# Altium PCB SM-sketch.PcbDoc
Units mm, origin at the board's own origin, x right, y up, seen from the top; angles counter-clockwise.
Board outline 433.1 x 352.2 mm, 2 copper layers (Top Layer, Bottom Layer); 15 components, 0 nets, 2 pads, 0 vias.
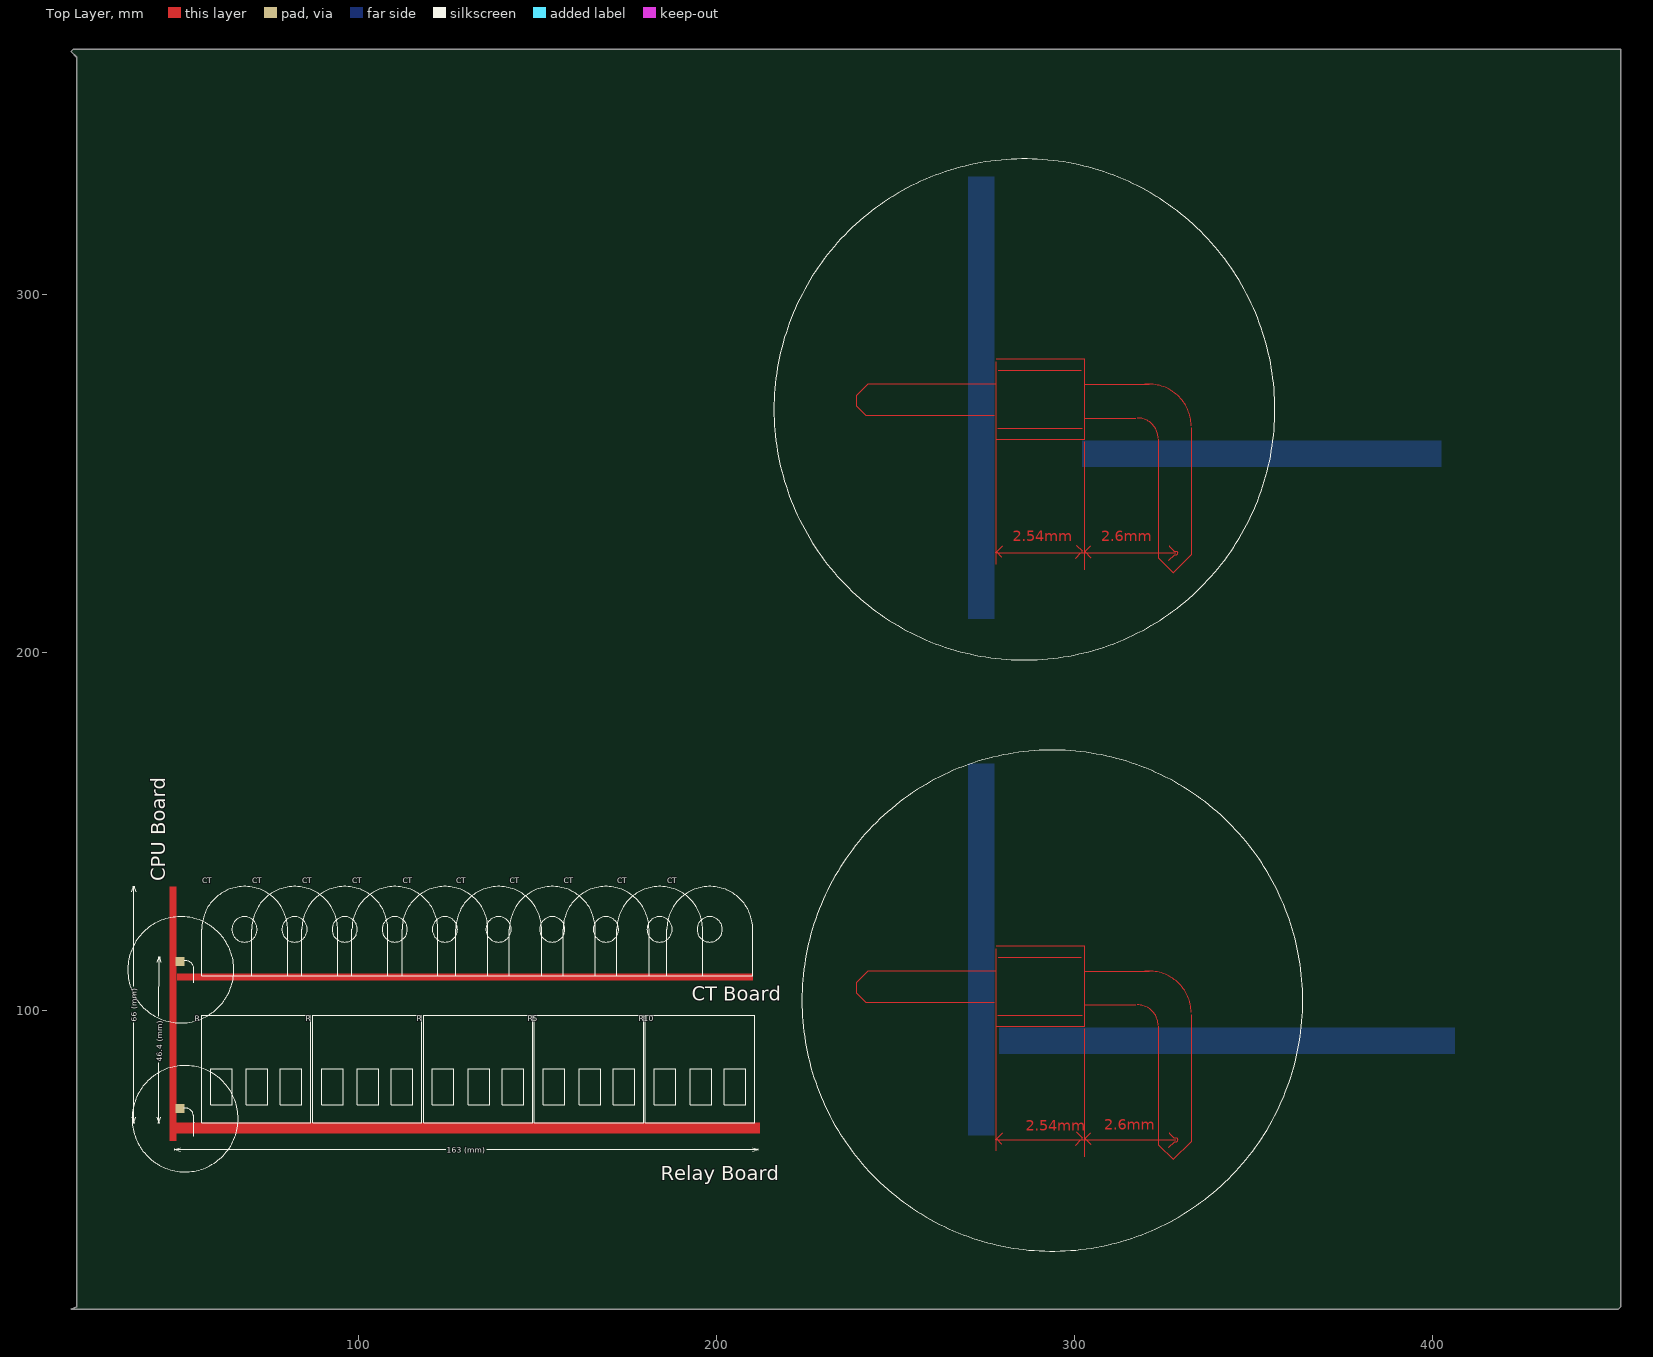
[diagram p0: Top Layer view]
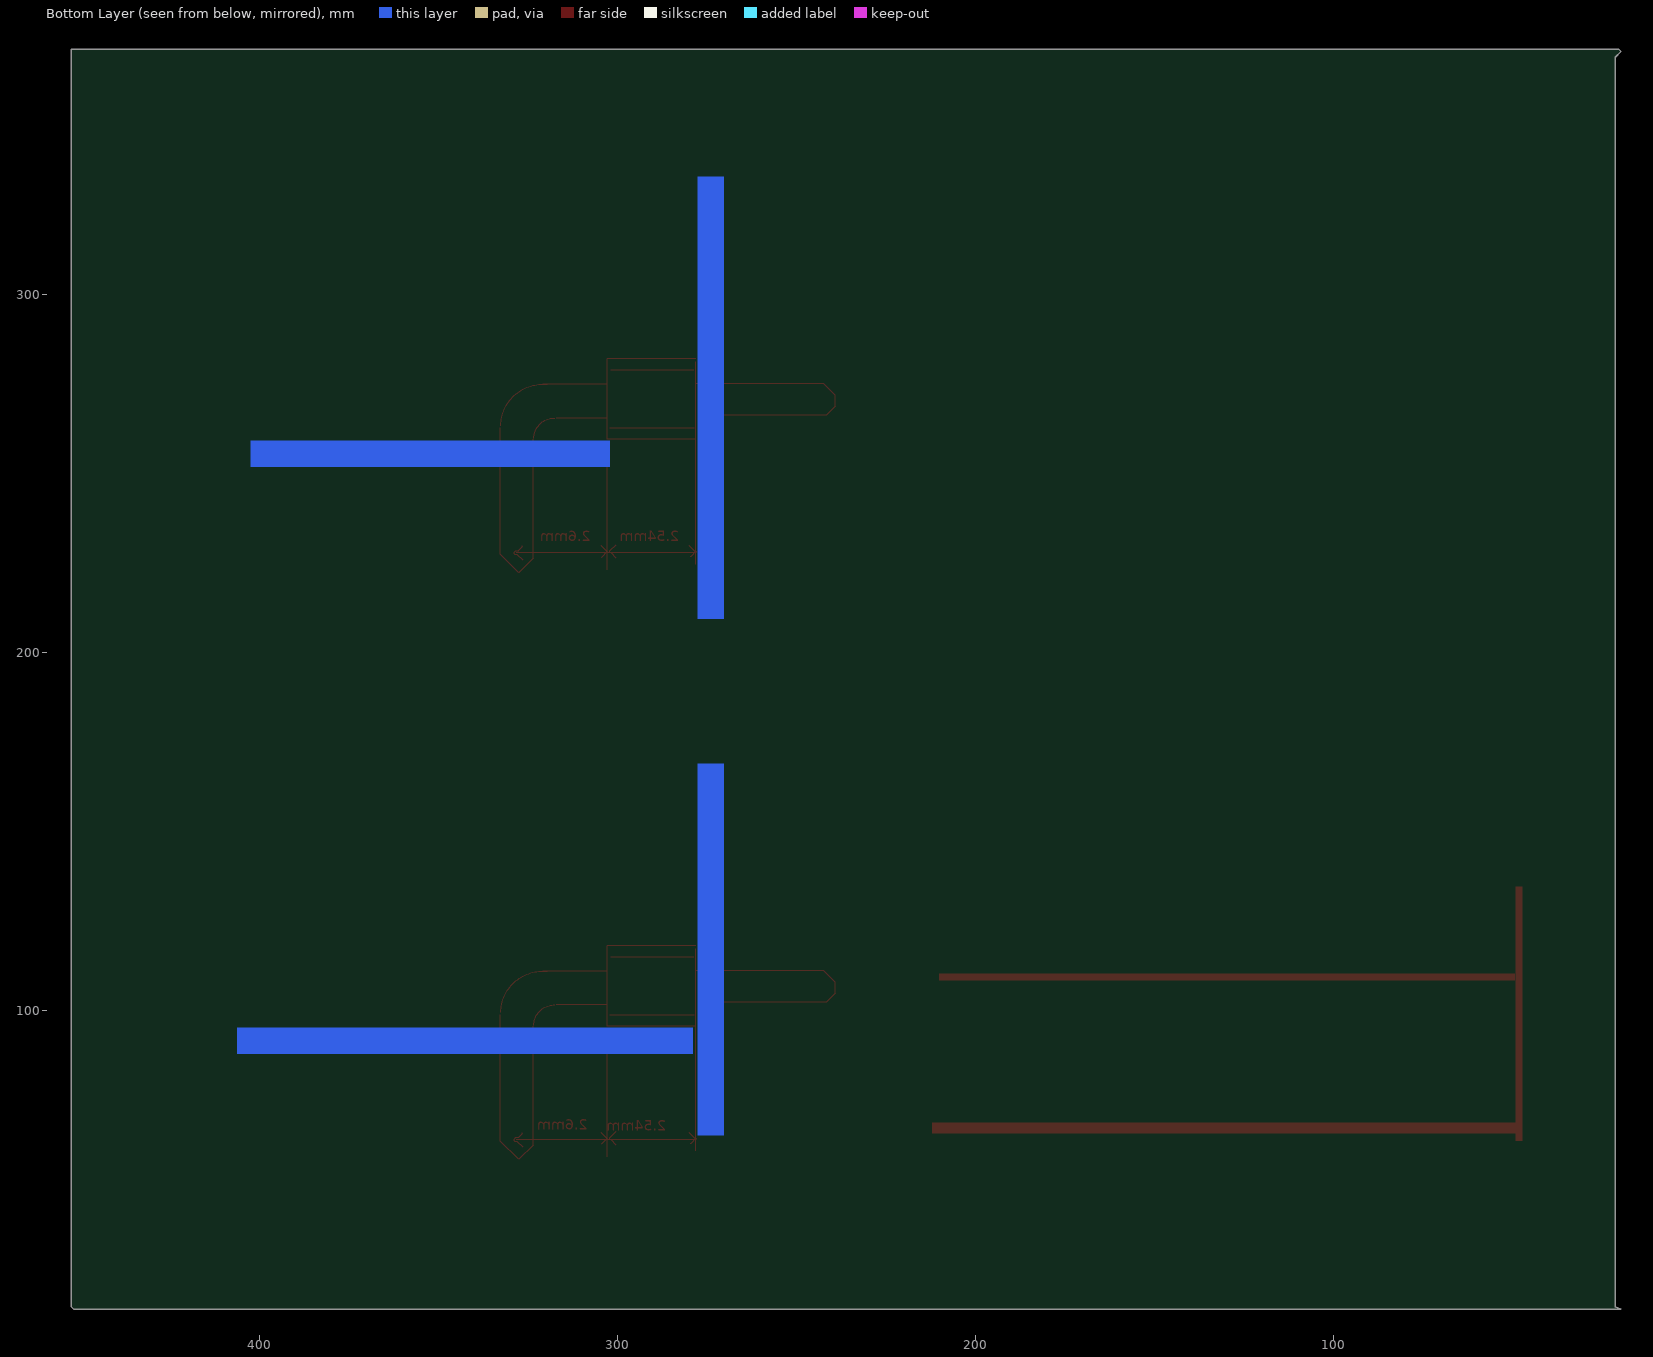
[diagram p1: Bottom Layer view, seen from below]

## Layer stack, top to bottom
Top Layer: signal copper 0.0356
Dielectric: dielectric 0.32, FR-4, Dk 4.8
Bottom Layer: signal copper 0.0356

## Board outline
19.6,16.5 451.9,16.5 452.7,17.3 452.7,368.7 20.3,368.7 19.6,368 21.2,366.4 21.2,17.3

## Design rules (kind name [scope] priority, off if disabled: settings)
Clearance [All] p1: gap=0.254
PolygonConnect [All] p1: connectstyle=Relief reliefconductorwidth=0.254 reliefentries=4 polygonreliefangle="90 Angle" airgapwidth=0.254
RoutingVias [All] p1: holewidth=0.711 width=1.27 viastyle="Through Hole" minholewidth=0.711 minwidth=1.27 maxholewidth=0.711 maxwidth=1.27
SolderMaskExpansion [All] p1: expansion=0.102
Width [All] p1: maxlimit=0.254 minlimit=0.254 preferedwidth=0.254
28 further rules are at their usual default settings.

## Components (designator, comment, footprint, x,y, rotation, side; value= is the part's Value field where it differs from the comment)
CT "Comment" CT-sketch 186.1,109.7 r0 top
CT "Comment" CT-sketch 172.1,109.7 r0 top
CT "Comment" CT-sketch 157.1,109.7 r0 top
CT "Comment" CT-sketch 142.1,109.7 r0 top
CT "Comment" CT-sketch 127.1,109.7 r0 top
CT "Comment" CT-sketch 112.1,109.7 r0 top
CT "Comment" CT-sketch 98.1,109.7 r0 top
CT "Comment" CT-sketch 84.1,109.7 r0 top
CT "Comment" CT-sketch 70.1,109.7 r0 top
CT "Comment" CT-sketch 56.1,109.7 r0 top
R "Comment" D136-sketch 118.1,68.7 r0 top
R "Comment" D136-sketch 87.1,68.7 r0 top
R "Comment" D136-sketch 56.1,68.7 r0 top
R5 "Comment" D136-sketch 149.1,68.7 r0 top
R10 "Comment" D136-sketch 180.1,68.7 r0 top

## Footprints (in the part's own frame and the unit in brackets; to place one, negate y for a bottom-side part, rotate by r counter-clockwise, add the part's x,y. Pads: shape width x height; smd on the part's side, far side on the other; paste and mask are expansions set on the pad)
CT-sketch [mm]
  silkscreen extent 0,0 24,25
D136-sketch [mm]
  silkscreen extent 0,0 30.5,30

## Free pads (board coordinates)
  rect 2.524x2.524 smd: 0(50,113.7) 0(50.1,72.7)

## Nets (pads, with @x,y where several pads share a name; then routed paths per layer and width w, separated by ;. In a path a pad name is that pad's centre, name@x,y a point inside that pad or via, vN(x,y) a via of type N, cw(c..) or ccw(c..) an arc to the next point about the centre after c; other vN are vias at no path point)
copper on no net: | length 1018.2
  Top Layer w0.254: 277.592,102.4 241.6,102.4 241.2,102.8 239.1,104.9 239.1,107.9 242.4,111.2 278.1,111.2 ; 277.592,266.4 241.6,266.4 241.2,266.8 239.1,268.9 239.1,271.9 242.4,275.2 278.1,275.2 ; 277.9,64.1 278.1,64.1 279.9,65.9 ; 277.9,228.1 278.1,228.1 279.9,229.9 ; 278.1,60.8 278.1,95.7 ; 278.1,64.3 279.6,62.8 279.7,62.8 ; 278.1,117.3 278.1,95.7 ; 278.1,118.1 278.9,118.1 302.8,118.1 302.8,95.7 278.1,95.7 ; 278.1,224.8 278.1,259.7 ; 278.1,228.3 279.6,226.8 279.7,226.8 ; 278.1,281.3 278.1,259.7 ; 278.1,282.1 278.9,282.1 302.8,282.1 302.8,259.7 278.1,259.7 ; 278.3,63.9 303,63.9 ; 278.3,227.9 303,227.9 ; 278.5,98.7 302.2,98.7 ; 278.5,262.7 302.2,262.7 ; 278.7,114.9 301.892,114.9 ; 278.7,278.9 301.892,278.9 ; 300.3,62.4 301.8,63.9 303,63.9 ; 300.3,226.4 301.8,227.9 303,227.9 ; 300.5,66.1 302.1,64.5 302.1,63.9 ; 300.5,230.1 302.1,228.5 302.1,227.9 ; 302.8,59.2 302.8,94.9 ; 302.8,111 320.9,111 ; 302.8,223.2 302.8,258.9 ; 302.8,275 320.9,275 ; 302.9,101.6 317.1,101.6 ; 302.9,265.6 317.1,265.6 ; 304.6,62.6 302.9,64.3 302.8,64.3 303,64.3 304.6,65.9 ; 304.6,226.6 302.9,228.3 302.8,228.3 303,228.3 304.6,229.9 ; 317.5,101.6 cw(c317.6,95.8) 323.4,95.9 ; 317.5,265.6 cw(c317.6,259.8) 323.4,259.9 ; 319.6,111 cw(c320.78,99.198) 332.637,99.497 ; 319.6,275 cw(c320.78,263.198) 332.637,263.497 ; 323.6,95.7 323.6,62.4 327.6,58.4 332.7,63.5 332.7,98.868 ; 323.6,259.7 323.6,226.4 327.6,222.4 332.7,227.5 332.7,262.868 ; 326.4,61.8 327.992,63.392 328.51,63.392 328.808,63.69 328.808,64.11 328.51,64.408 327.792,64.408 327.7,64.5 326.6,65.6 326.6,65.9 ; 326.4,225.8 327.992,227.392 328.51,227.392 328.808,227.69 328.808,228.11 328.51,228.408 327.792,228.408 327.7,228.5 326.6,229.6 326.6,229.9 ; 328.3,63.9 303,63.9 ; 328.3,227.9 303,227.9

## Other copper
Top Layer:
  rectangle: 49.2,108.4 210.2,110.4
  rectangle: 47.1,63.5 49.1,134.7
  rectangle: 49.1,65.7 212.1,68.7
  text "2.54mm" at 282.8,231.1 h3
  text "2.6mm" at 307.5,231.1 h3
  text "2.6mm" at 308.3,66.7 h3
  text "2.54mm" at 286.4,66.5 h3
Bottom Layer:
  rectangle: 302.1,251.9 402.5,259.3
  region: 277.7,209.5 277.7,333.1 270.3,333.1 270.3,209.5
  region: 277.7,65.1 277.7,169.1 270.3,169.1 270.3,65.1
  rectangle: 278.9,87.9 406.4,95.3

## Silkscreen, mask and mechanical layers (free items; w line width, h text height)
Top Overlay:
  circle w0.254: c286.014,268 r70
  circle w0.254: c51.463,69.8 r14.837
  circle w0.254: c293.814,102.8 r70
  circle w0.254: c50.263,111.4 r14.837
  lines w0.254: 36.592,70.224 37.1,68.7 ; 36.592,133.176 37.1,134.7 ; 36.846,68.7 37.354,68.7 ; 36.846,134.7 37.354,134.7 ; 37.1,96.596 37.1,68.7 ; 37.1,106.804 37.1,134.7 ; 37.608,70.224 37.1,68.7 ; 37.608,133.176 37.1,134.7 ; 43.595,70.225 44.1,68.7 ; 43.689,113.577 44.2,115.1 ; 43.846,68.701 44.354,68.699 ; 43.946,115.101 44.454,115.099 ; 44.136,85.4 44.1,68.7 ; 44.164,98.4 44.2,115.1 ; 44.611,70.223 44.1,68.7 ; 44.705,113.575 44.2,115.1 ; 48.576,60.938 48.576,61.446 ; 50.1,60.684 48.576,61.192 ; 50.1,61.7 48.576,61.192 ; 51.1,72.7 cw(c51.516,70.408) 53.843,70.298 53.843,68.757 ; 51.2,113.9 cw(c51.616,111.608) 53.943,111.498 53.943,107.843 ; 53.843,64.943 53.843,68.757 ; 53.9,68.7 53.843,68.757 ; 124.337,61.192 48.576,61.192 ; 135.815,61.192 211.576,61.192 ; 210.052,60.684 211.576,61.192 ; 210.052,61.7 211.576,61.192 ; 211.576,60.938 211.576,61.446
  text "CPU Board" at 45.9,136.1 h4 r90
  text "CT Board" at 193,102.8 h4
  text "66 (mm)" at 38.014,96.85 h1.52 r90
  text "CPU Board" at -42,86.4 h1.52
  text "46.4 (mm)" at 45.051,85.652 h1.52 r89.88
  text "CPU Board" at -37.1,79.2 h1.52
  text "163 (mm)" at 124.591,60.278 h1.52
  text "Relay Board" at 184.4,52.6 h4